# Altium PCB PCB_hzpbysj_2021-12-04.pcbdoc
Units mil, origin at the board's own origin, x right, y up, seen from the top; angles counter-clockwise.
Board outline 6148 x 4183.3 mil, 2 copper layers (Top Layer, Bottom Layer); 10 components, 58 nets, 88 pads, 0 vias.
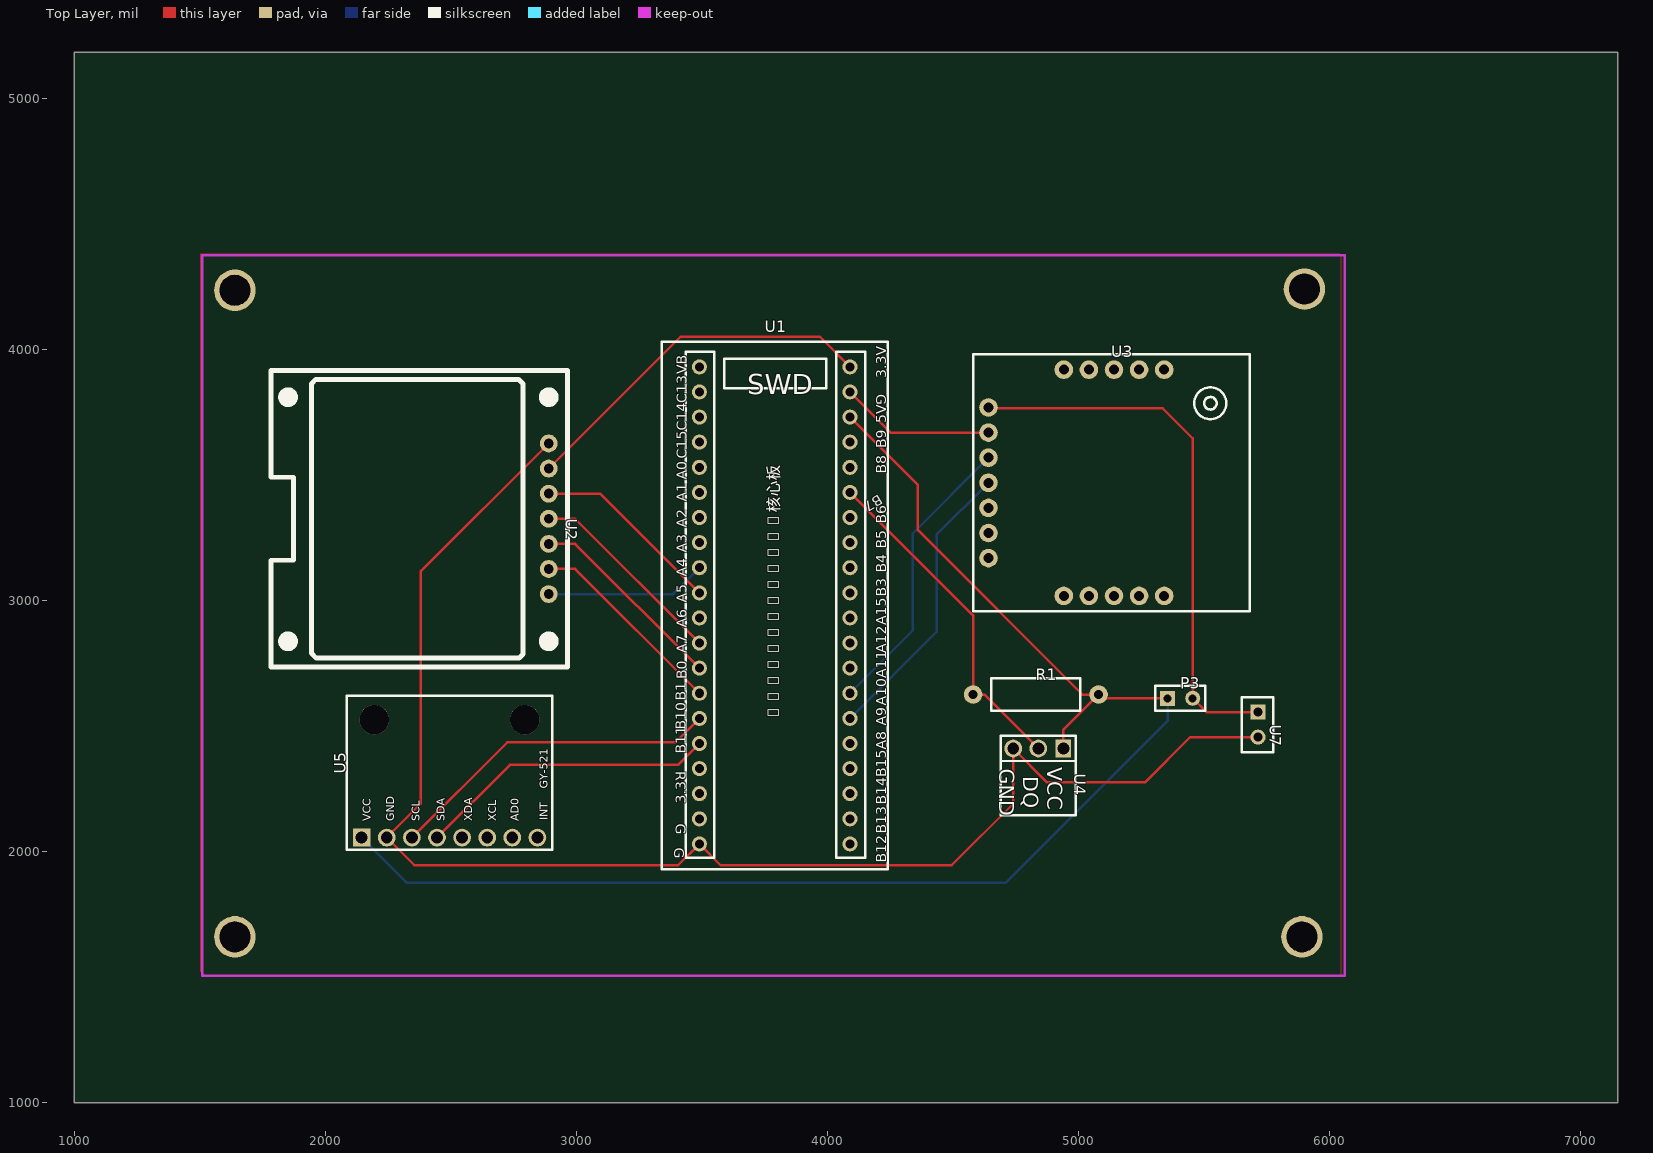
[diagram p0: Top Layer view]
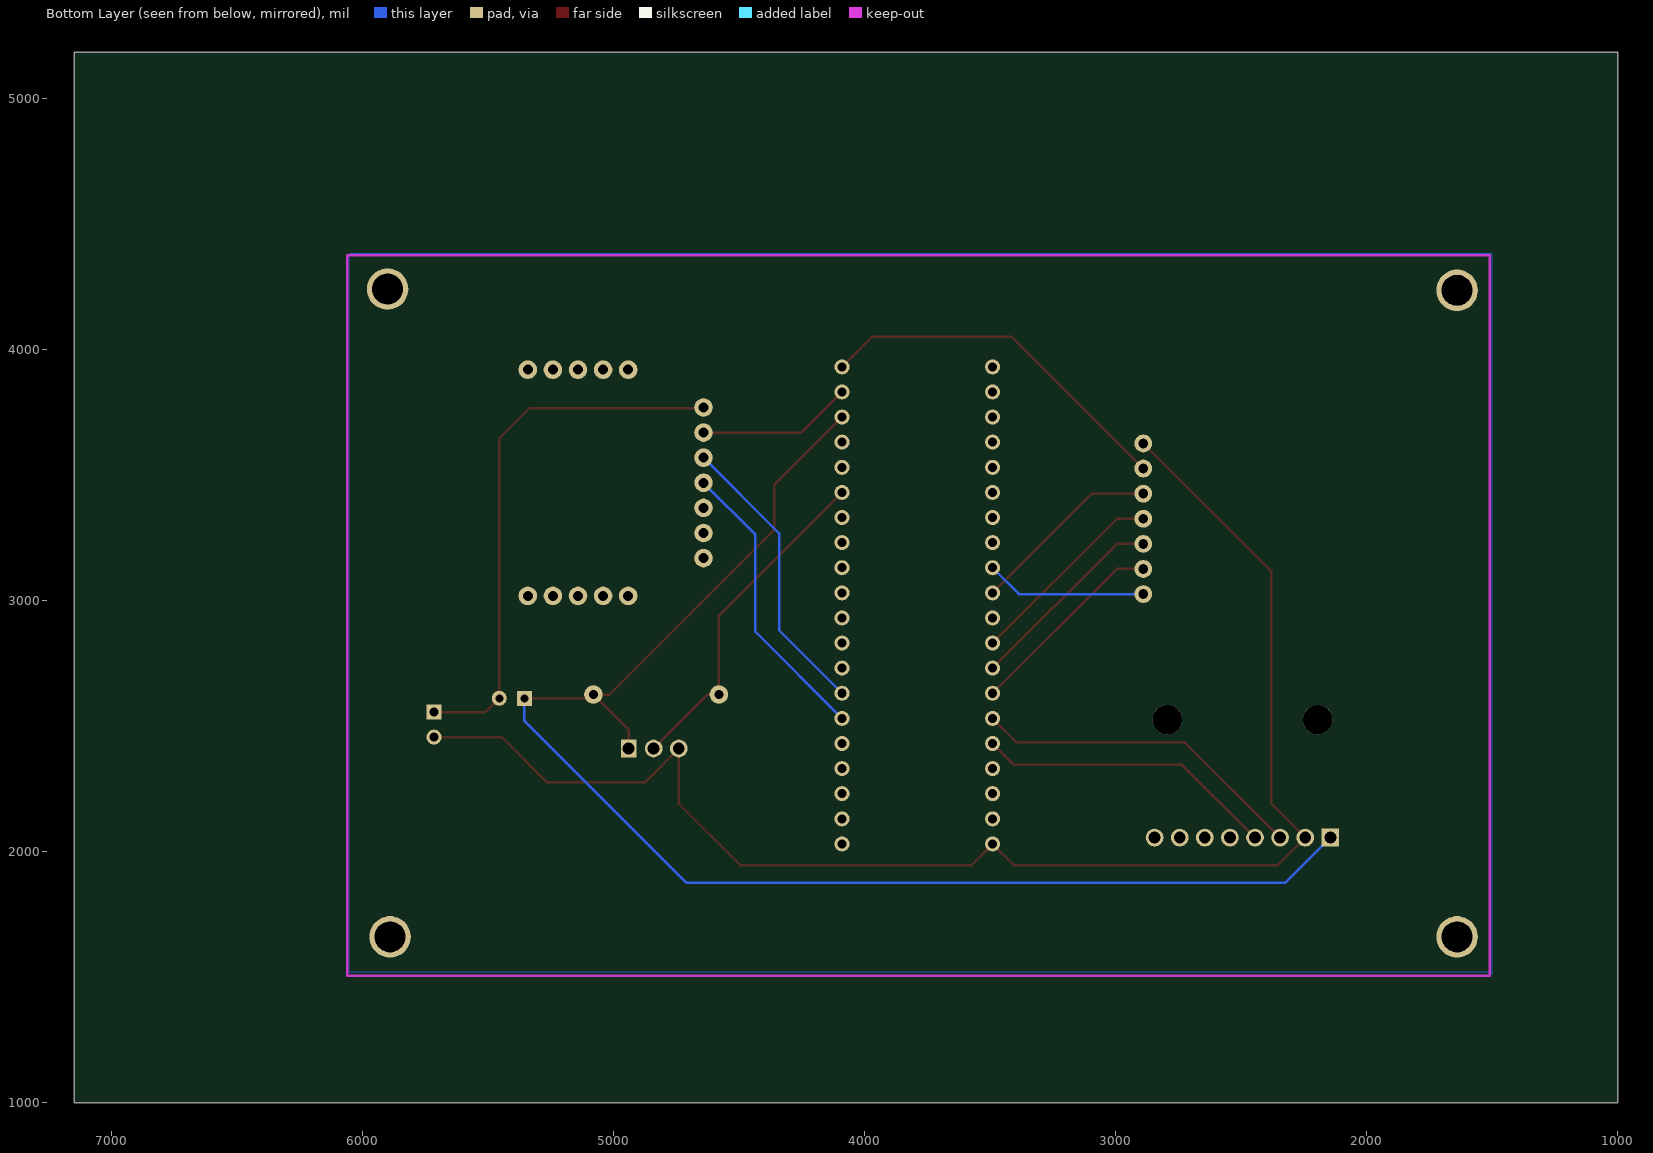
[diagram p1: Bottom Layer view, seen from below]

## Layer stack, top to bottom
Top Layer: signal copper (thickness not stored)
Dielectric: dielectric 12.6, FR-4, Dk 4.8
Bottom Layer: signal copper (thickness not stored)

## Board outline
7148,1000 1000,1000 1000,5183.3 7148,5183.3

## Components (designator, comment, footprint, x,y, rotation, side; value= is the part's Value field where it differs from the comment)
P3 "2.54-1*2P_ZX" 2.54-1*2P_TIGHT_JX 5405,2610 r0 top
R1 "10K" AXIAL-0.5 4830,2625 r0 top
U1 "STM32F103C8T6核心板" STM32F103C8T6核心板 3790,2980 r0 top
U2 "OLED0.96" OLED 2890,3325 r270 top
U3 "SIM800C" SIM800C模块-DIP_MK 4580,3980 r0 top
U4 "DS18B20（防水版）" DS18B20（防水版） 4935,2410 r270 top
U5 "GY-521" GY-521_FOOTPRINT 2145,2055 r90 top
U7 "双排针2×1P" 双排针2×1 5715,2555 r270 top
? "" ? 3787.5,4528.15 r0 top
? "" ? 6205.87,2940 r0 top

## Footprints (in the part's own frame and the unit in brackets; to place one, negate y for a bottom-side part, rotate by r counter-clockwise, add the part's x,y. Pads: shape width x height; smd on the part's side, far side on the other; paste and mask are expansions set on the pad)
2.54-1*2P_TIGHT_JX [mm]
  rect 1.52x1.52 hole 0.81: 1(-1.27,0)
  round 1.52 hole 0.81: 2(1.27,0)
  silkscreen extent -2.54,-1.27 2.54,1.27
AXIAL-0.5 [mil]
  round 74 hole 35.4: 1(-250,0) 2(250,0)
  silkscreen extent -177,-65 177,65
DS18B20（防水版） [mm]
  rect 1.8x1.575 hole 1.2: 1(0,0.127)
  round 1.8 hole 1.2: 2(0,-2.413) 3(0,-4.953)
  silkscreen extent -1.27,-6.22 6.73,1.4
GY-521_FOOTPRINT [mm]
  rect 1.575x1.575 hole 0.889: 1(0,0)
  rect 1.8x1.8 hole 1.2: 1(0,0)
  round 1.8 hole 1.2: 2(0,-2.54) 3(0,-5.08) 4(0,-7.62) 5(0,-10.16) 6(0,-12.7) 7(0,-15.24) 8(0,-17.78)
  round 3 hole 3 unplated: ""(11.938,-1.27) ""(11.938,-16.51)
  silkscreen extent -1.22,-19.3 14.34,1.52
OLED [mm]
  round 1.8 hole 1: 1(-7.62,0) 2(-5.08,0) 3(-2.54,0) 4(0,0) 5(2.54,0) 6(5.08,0) 7(7.62,0)
  silkscreen extent -15,-28.1 15,1.9
SIM800C模块-DIP_MK [mil]
  round 74 hole 40: 1(61.42,-211.81) 2(61.42,-311.81) 3(61.42,-411.81) 4(61.42,-511.81) 5(61.42,-611.81) 6(61.42,-711.81) 7(61.42,-811.81) 8(761.42,-61.41) 9(661.42,-61.41) 10(561.42,-61.41) 11(461.42,-61.41) 12(361.42,-61.42) 13(361.42,-962.2) 14(461.42,-962.2) 15(561.42,-962.2) 16(661.42,-962.2) 17(761.42,-962.2)
  silkscreen extent 0,-1024 1102,0
STM32F103C8T6核心板 [mil]
  round 60 hole 36: 1(-300,950) 2(-300,850) 3(-300,750) 4(-300,650) 5(-300,550) 6(-300,450) 7(-300,350) 8(-300,250) 9(-300,150) 10(-300,50) 11(-300,-50) 12(-300,-150) 13(-300,-250) 14(-300,-350) 15(-300,-450) 16(-300,-550) 17(-300,-650) 18(-300,-750) 19(-300,-850) 20(-300,-950) 21(300,-950) 22(300,-850) 23(300,-750) 24(300,-650) 25(300,-550) 26(300,-450) 27(300,-350) 28(300,-250) 29(300,-150) 30(300,-50) 31(300,50) 32(300,150) 33(300,250) 34(300,350) 35(300,450) 36(300,550) 37(300,650) 38(300,750) 39(300,850) 40(300,950)
  silkscreen extent -450,-1050 450,1050
双排针2×1 [mil]
  rect 60x60 hole 36: 1(0,0)
  round 60 hole 36: 2(100,0)
  silkscreen extent -60,-65 160,60
? [mil]

## Free pads (board coordinates)
  round 165.35 hole 122.05 slot 122.25 at 0 deg: 123(1640,1660) 123(1640,4235) 123(5890,1660) 123(5900,4240)

## Nets (pads, with @x,y where several pads share a name; then routed paths per layer and width w, separated by ;. In a path a pad name is that pad's centre, name@x,y a point inside that pad or via, vN(x,y) a via of type N, cw(c..) or ccw(c..) an arc to the next point about the centre after c; other vN are vias at no path point)
+3.3V: U1.40 U2.2 | length 1467.2
  Top Layer w10: U2.2 3415,4050 3970,4050 U1.40
+5V: P3.1 R1.2 U1.38 U4.1 U5.1 | length 5749.1
  Top Layer w10: U1.38 4360,3460 4360,3280 5015,2625 R1.2 ; U4.1 4940,2485 R1.2 ; P3.1 5095,2610 R1.2
  Bottom Layer w10: U5.1@2145,2055 2325,1875 4710,1875 5355,2520 P3.1
GND: pad.123 U1.20 U1.39 U2.1 U3.2 U4.3 U5.2 U7.2 | length 6493.6
  Top Layer w10: U2.1 2380,3115 2380,2190 U5.2 2355,1945 3405,1945 U1.20 3575,1945 4495,1945 4740,2190 U4.3 4875,2275 5265,2275 5445,2455 U7.2 ; U1.39 4251.81,3668.19 U3.2
PA4: U1.9 U2.7 | length 643.5
  Bottom Layer w10: U2.7 3385,3025 U1.9
PA5: U1.10 U2.3 | length 763.6
  Top Layer w10: U2.3 3095,3425 U1.10
PA7: U1.12 U2.4 | length 805
  Top Layer w10: U2.4 2995,3325 U1.12
PA9: U1.26 U3.4 | length 1166.6
  Bottom Layer w10: U1.26 4435,2875 4435,3261.77 U3.4
PA10: U1.27 U3.3 | length 1166.6
  Bottom Layer w10: U1.27 4340,2880 4340,3266.77 U3.3
PB0: U1.13 U2.5 | length 805
  Top Layer w10: U2.5 2995,3225 U1.13
PB1: U1.14 U2.6 | length 805
  Top Layer w10: U2.6 2995,3125 U1.14
PB7: R1.1 U1.35 U4.2 | length 1357
  Top Layer w10: U1.35 4580,2940 R1.1 4625,2625 U4.2
PB10: U1.15 U5.3 | length 1341.8
  Top Layer w10: U5.3 2725,2435 3395,2435 U1.15
PB11: U1.16 U5.4 | length 1200.3
  Top Layer w10: U5.4 2735,2345 3405,2345 U1.16
S$18939: 
U1_1: U1.1
U1_2: U1.2
U1_3: U1.3
U1_4: U1.4
U1_5: U1.5
U1_6: U1.6
U1_7: U1.7
U1_8: U1.8
U1_11: U1.11
U1_17: U1.17
U1_18: U1.18
U1_19: U1.19
U1_21: U1.21
U1_22: U1.22
U1_23: U1.23
U1_24: U1.24
U1_25: U1.25
U1_28: U1.28
U1_29: U1.29
U1_30: U1.30
U1_31: U1.31
U1_32: U1.32
U1_33: U1.33
U1_34: U1.34
U1_36: U1.36
U1_37: U1.37
U3_5: U3.5
U3_6: U3.6
U3_7: U3.7
U3_8: U3.8
U3_9: U3.9
U3_10: U3.10
U3_11: U3.11
U3_12: U3.12
U3_13: U3.13
U3_14: U3.14
U3_15: U3.15
U3_16: U3.16
U3_17: U3.17
U5_5: U5.5
U5_6: U5.6
U5_7: U5.7
U5_8: U5.8
VCC: P3.2 U3.1 U7.1 | length 2182.4
  Top Layer w10: U3.1 4644.61,3765 5335,3765 5455,3645 P3.2 5510,2555 U7.1
pads on no net: U5.

## Polygon pours and split planes (outlines as drawn)
GND on Bottom Layer (solid): 1500,4380 6050,4380 6055,4375 6055,1520 1510,1520 1500,1510
GND on Top Layer (solid): 1505,4380 6040,4380 6045,4375 6045,1505 1520,1505 1505,1520

## Text inside footprints (layer, text, board x,y; h text height)
U1: Top Overlay "G" at 3395,2110 h40 r270; Top Overlay "3.3V" at 4235,3885 h40 r90; Top Overlay "G" at 4195,3820 h40 r270; Top Overlay "5V" at 4235,3705 h40 r90; Top Overlay "B9" at 4235,3605 h40 r90; Top Overlay "B8" at 4235,3505 h40 r90; Top Overlay "B7" at 4204.7,3422.14 h40 r211; Top Overlay "B6" at 4235,3305 h40 r90; Top Overlay "B5" at 4235,3205 h40 r90; Top Overlay "B4" at 4235,3110 h40 r90; Top Overlay "B3" at 4235,3015 h40 r90; Top Overlay "A15" at 4235,2900 h40 r90; Top Overlay "A12" at 4235,2790 h40 r90; Top Overlay "A11" at 4235,2690 h40 r90; Top Overlay "A10" at 4235,2580 h40 r90; Top Overlay "A9" at 4235,2500 h40 r90; Top Overlay "A8" at 4235,2405 h40 r90; Top Overlay "B15" at 4235,2295 h40 r90; Top Overlay "B14" at 4235,2185 h40 r90; Top Overlay "B13" at 4235,2070 h40 r90; Top Overlay "B12" at 4235,1955 h40 r90; Top Overlay "VB" at 3440,3900 h40 r90; Top Overlay "C13" at 3440,3785 h40 r90; Top Overlay "C14" at 3440,3675 h40 r90; Top Overlay "C15" at 3440,3565 h40 r90; Top Overlay "A0" at 3440,3480 h40 r90; Top Overlay "A1" at 3440,3392.63 h40 r90; Top Overlay "A2" at 3440,3290 h40 r90; Top Overlay "A3" at 3440,3190 h40 r90; Top Overlay "A4" at 3440,3095 h40 r90; Top Overlay "A5" at 3440,2990 h40 r90; Top Overlay "A6" at 3440,2890 h40 r90; Top Overlay "A7" at 3440,2790 h40 r90; Top Overlay "B0" at 3440,2685 h40 r90; Top Overlay "B1" at 3435,2600 h40 r90; Top Overlay "B10" at 3435,2485 h40 r90; Top Overlay "B11" at 3435,2390 h40 r90; Top Overlay "R" at 3395,2320 h40 r270; Top Overlay "3.3" at 3435,2190 h40 r90; Top Overlay "G" at 3390,2015 h40 r270; Top Overlay "SWD" at 3680,3820 h80
U4: Top Overlay "VCC" at 4875,2335 h60 r270; Top Overlay "DQ" at 4780,2300 h60 r270; Top Overlay "GND" at 4685,2330 h60 r270
U5: Top Overlay "VCC" at 2180.75,2120 h31.5 r90; Top Overlay "GND" at 2275.75,2120 h31.5 r90; Top Overlay "SCL" at 2375.75,2120 h31.5 r90; Top Overlay "SDA" at 2475.75,2120 h31.5 r90; Top Overlay "XDA" at 2585.75,2120 h31.5 r90; Top Overlay "XCL" at 2680.75,2120 h31.5 r90; Top Overlay "AD0" at 2770.75,2120 h31.5 r90; Top Overlay "INT" at 2885.75,2125 h31.5 r90